# Altium PCB lab1_sokolov_usb_i2c.PcbDoc
Units mm, origin at the board's own origin, x right, y up, seen from the top; angles counter-clockwise.
Board outline 57.23 x 22.27 mm, 4 copper layers (Top Layer, Signal Layer 1, Signal Layer 2, Bottom Layer), stack 1.522 mm thick; 44 components, 33 nets, 163 pads, 97 vias.
Unrouted connection lines stored in the file: 1.
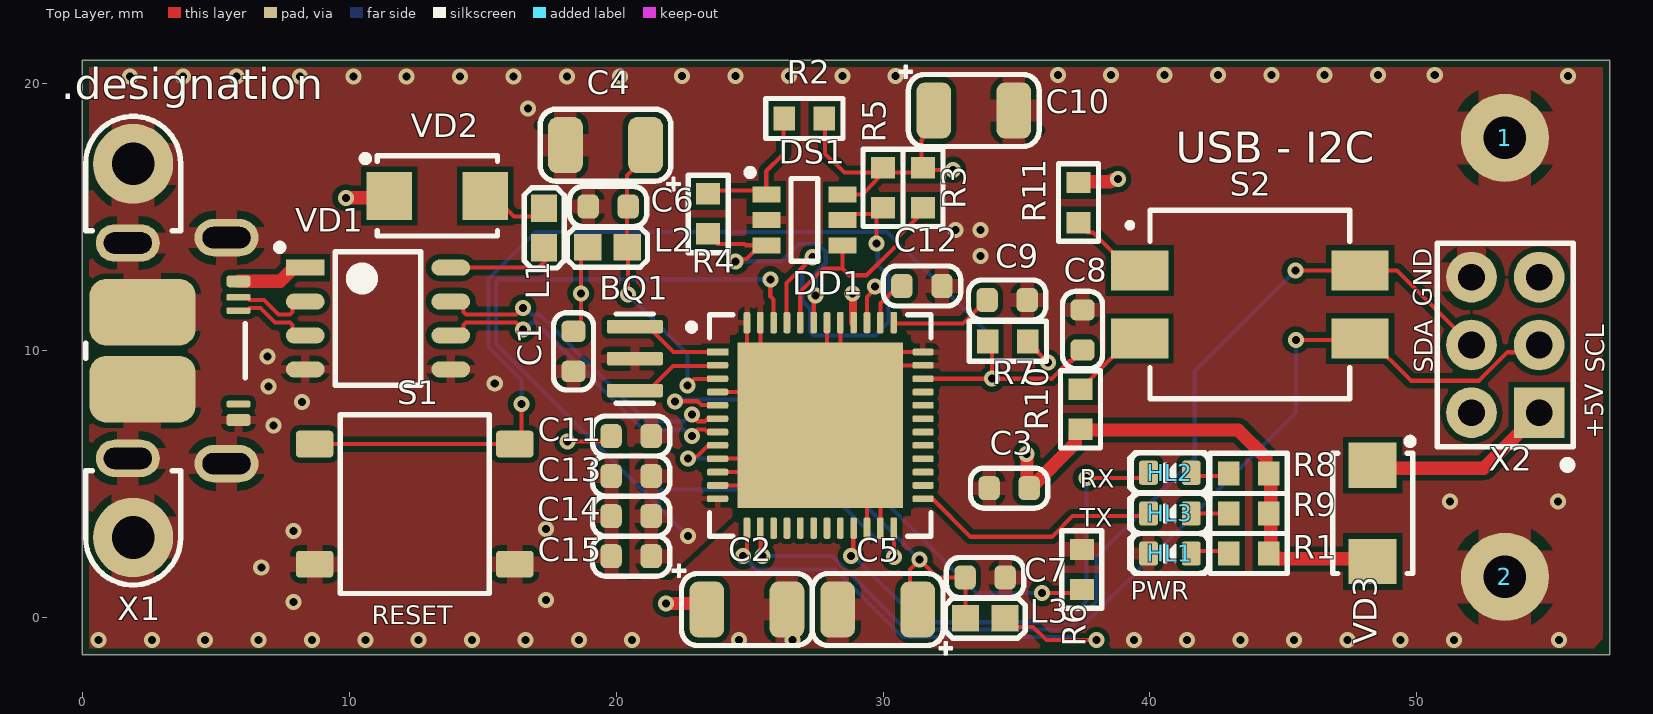
[diagram p0: Top Layer view]
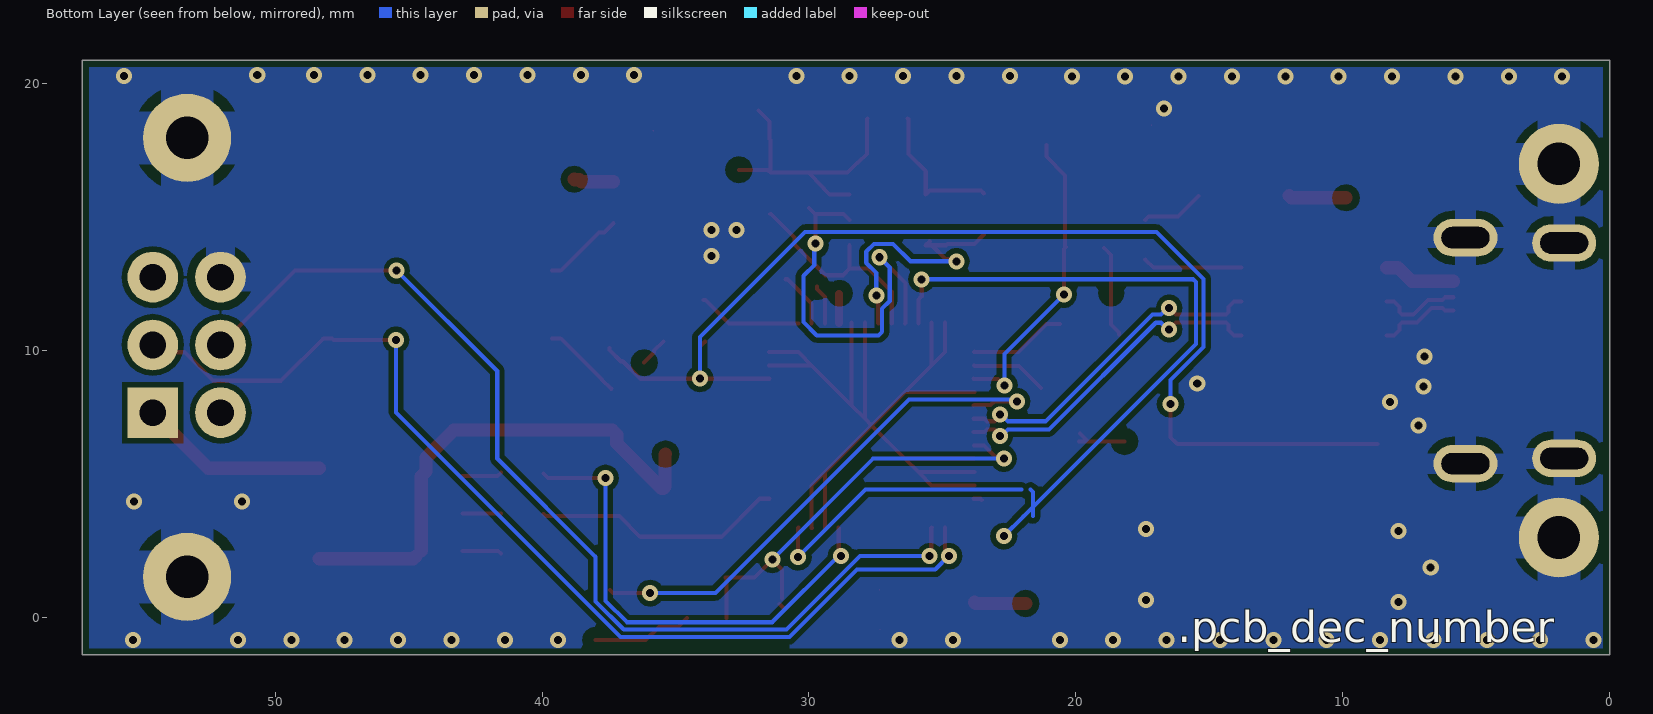
[diagram p1: Bottom Layer view, seen from below]
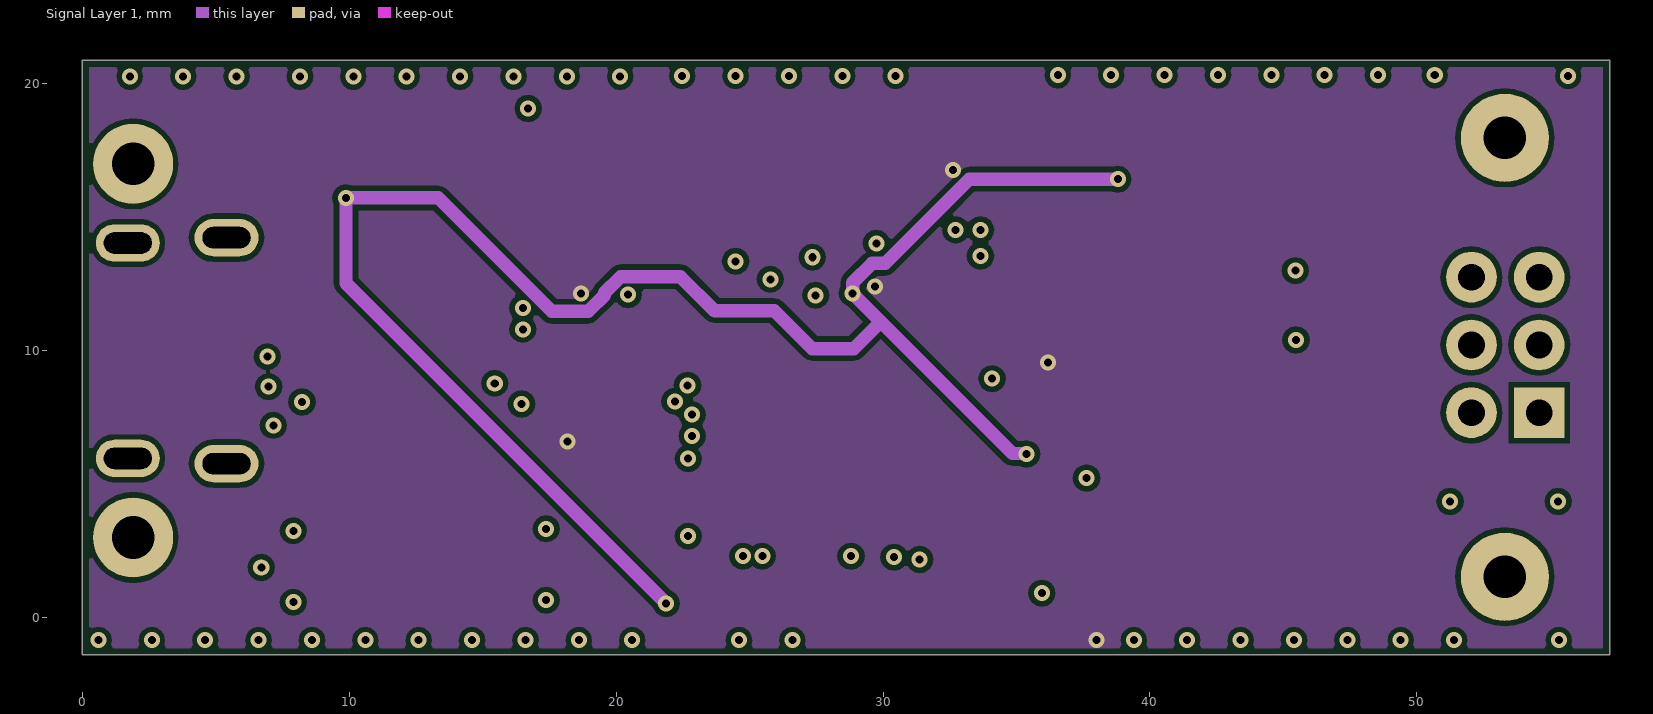
[diagram p2: Signal Layer 1]
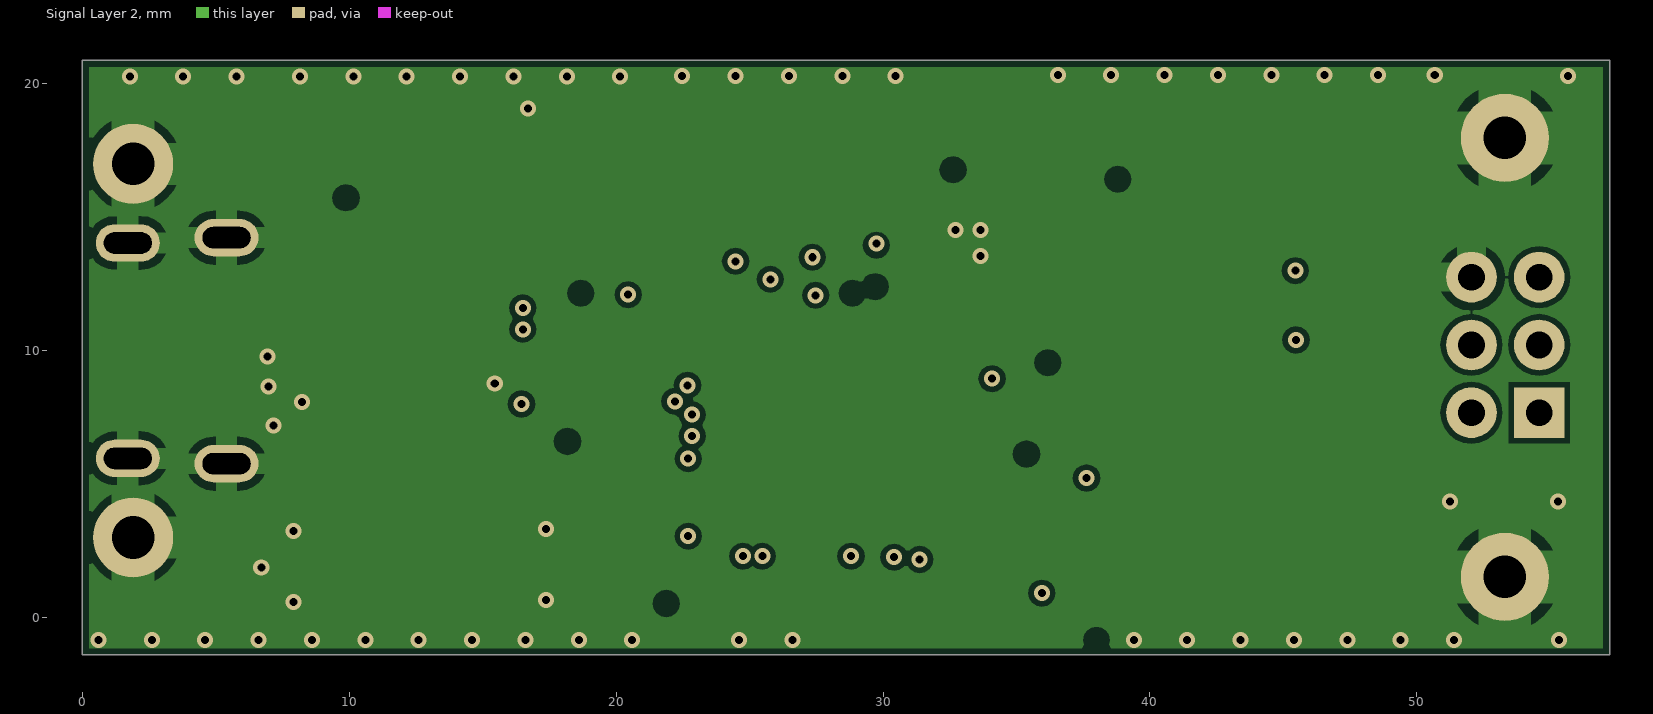
[diagram p3: Signal Layer 2]

## Layer stack, top to bottom
Top Solder: solder mask 0.0102, Solder Resist, Dk 3.5
Top Layer: signal copper 0.018
Prepreg 1: prepreg 0.125, FR4 HiTg170, Dk 5.07
Signal Layer 1: signal copper 0.018
Core 1: core 1.2, FR4, Dk 4.6
Signal Layer 2: signal copper 0.018
Prepreg 2: prepreg 0.125, FR4 HiTg170, Dk 5.07
Bottom Layer: signal copper 0.018
Bottom Solder: solder mask 0.0102, Solder Resist, Dk 3.5

## Board outline
0,-1.4 57.225,-1.4 57.225,20.875 0,20.875

## Design rules (kind name [scope] priority, off if disabled: settings)
AcuteAngle min_acute_angle [OnCopper] p1: minimum=3.50000000000000E+0001 checktracksonly=FALSE // Минимальный угол между примитивами топологии
BoardOutlineClearance board_outline_clearance_std [NOT (OnLayer('Bottom Overlay') OR OnLayer('Top Overlay'))] p1: gap=0.25 ignorepadtopadclearanceinfootprint=FALSE except(0: Arc-SplitContinuation Track-SplitContinuation SMDPad-SplitContinuation THPad-SplitContinuation Via-SplitContinuation Fill-SplitContinuation Poly-SplitContinuation Region-SplitContinuation Text-SplitContinuation) // Отступ элементов топологии от края фрезеруемой печатной платы
Clearance clearance_outer_18um_std [OnTopLayer OR OnBottomLayer] p1: gap=0.125 ignorepadtopadclearanceinfootprint=TRUE except(0.2: Arc-Fill Arc-Poly Track-Fill Track-Poly SMDPad-SMDPad SMDPad-Fill SMDPad-Poly THPad-Fill THPad-Poly Via-Fill Via-Poly Fill-Fill Fill-Poly Poly-Poly Poly-Region Poly-Text; 0.25: Arc-Hole Track-Hole SMDPad-Hole THPad-Hole Via-Hole Fill-Hole Poly-Hole Region-Hole Text-Hole) // Зазоры на внешних слоях
Clearance clearance_inner_18um_std [NOT (OnTopLayer Or OnBottomLayer)] p2: gap=0.125 ignorepadtopadclearanceinfootprint=FALSE except(0.2: Arc-Fill Arc-Poly Track-Fill Track-Poly SMDPad-SMDPad SMDPad-Fill SMDPad-Poly THPad-Fill THPad-Poly Via-Fill Via-Poly Fill-Fill Fill-Poly Poly-Poly Poly-Region Poly-Text; 0.25: Arc-Hole Track-Hole SMDPad-Hole THPad-Hole Via-Hole Fill-Hole Poly-Hole Region-Hole Text-Hole) // Зазоры на внутренних слоях
ComponentClearance [All] p1: gap=0 collisioncheckmode=3 verticalgap=0 showdistances=FALSE
DiffPairsRouting "Schematic Differential Pairs Routing_3" [InNet('D_N')] p1: maxlimit=0.254 minlimit=0.15 mostfreqgap=0.254 toplayer_maxgap=0.15 toplayer_prefgap=0.15 toplayer_minwidth=0.155 toplayer_maxwidth=0.155 toplayer_prefwidth=0.155 bottomlayer_maxgap=0.15 bottomlayer_prefgap=0.15 bottomlayer_minwidth=0.155 bottomlayer_maxwidth=0.155 bottomlayer_prefwidth=0.155 impedanceprofiledriven=TRUE impedanceprofileid={1B1F1868-2FFB-4D51-908A-913D90CA9AFC} impedanceprofilevalue=95.000000 maxuncoupledlength=12.7
DiffPairsRouting "Schematic Differential Pairs Routing_2" [InNet('D_P')] p2: maxlimit=0.254 minlimit=0.15 mostfreqgap=0.254 toplayer_maxgap=0.15 toplayer_prefgap=0.15 toplayer_minwidth=0.155 toplayer_maxwidth=0.155 toplayer_prefwidth=0.155 bottomlayer_maxgap=0.15 bottomlayer_prefgap=0.15 bottomlayer_minwidth=0.155 bottomlayer_maxwidth=0.155 bottomlayer_prefwidth=0.155 impedanceprofiledriven=TRUE impedanceprofileid={1B1F1868-2FFB-4D51-908A-913D90CA9AFC} impedanceprofilevalue=95.000000 maxuncoupledlength=12.7
DiffPairsRouting "Schematic Differential Pairs Routing_1" [InNet('USB_D_N')] p3: maxlimit=0.254 minlimit=0.15 mostfreqgap=0.254 toplayer_maxgap=0.15 toplayer_prefgap=0.15 toplayer_minwidth=0.155 toplayer_maxwidth=0.155 toplayer_prefwidth=0.155 bottomlayer_maxgap=0.15 bottomlayer_prefgap=0.15 bottomlayer_minwidth=0.155 bottomlayer_maxwidth=0.155 bottomlayer_prefwidth=0.155 impedanceprofiledriven=TRUE impedanceprofileid={1B1F1868-2FFB-4D51-908A-913D90CA9AFC} impedanceprofilevalue=95.000000 maxuncoupledlength=12.7
DiffPairsRouting "Schematic Differential Pairs Routing" [InNet('USB_D_P')] p4: maxlimit=0.254 minlimit=0.15 mostfreqgap=0.254 toplayer_maxgap=0.15 toplayer_prefgap=0.15 toplayer_minwidth=0.155 toplayer_maxwidth=0.155 toplayer_prefwidth=0.155 bottomlayer_maxgap=0.15 bottomlayer_prefgap=0.15 bottomlayer_minwidth=0.155 bottomlayer_maxwidth=0.155 bottomlayer_prefwidth=0.155 impedanceprofiledriven=TRUE impedanceprofileid={1B1F1868-2FFB-4D51-908A-913D90CA9AFC} impedanceprofilevalue=95.000000 maxuncoupledlength=12.7
DiffPairsRouting diff_pairs_routing [All] p5: maxlimit=0.254 minlimit=0.127 mostfreqgap=0.254 toplayer_maxgap=0.127 toplayer_prefgap=0.127 toplayer_minwidth=0.143 toplayer_maxwidth=0.143 toplayer_prefwidth=0.143 midlayer1_minwidth=0.381 midlayer1_maxwidth=0.381 midlayer1_prefwidth=0.381 midlayer2_minwidth=0.381 midlayer2_maxwidth=0.381 midlayer2_prefwidth=0.381 bottomlayer_maxgap=0.127 bottomlayer_prefgap=0.127 bottomlayer_minwidth=0.143 bottomlayer_maxwidth=0.143 bottomlayer_prefwidth=0.143 impedanceprofiledriven=TRUE maxuncoupledlength=12.7 // Правила трассировки дифференциальных пар
HoleSize min_hole_size_std [IsPad] p1: absolutevalues=TRUE maxlimit=5.9 minlimit=0.6 maxpercent=80.000 minpercent=20.000 // Диаметр межслойного переходного отверстия
HoleSize min_hole_size_via_std [IsVia] p2: absolutevalues=TRUE maxlimit=5.9 minlimit=0.3 maxpercent=80.000 minpercent=20.000 // Минимальный диаметр монтажного отверстия
HoleToHoleClearance hole_to_hole_clearance_std [All] p1: gap=0.2 allowstackedmicrovias=FALSE // Минимальное расстояние между краями двух отверстий
MinimumAnnularRing min_via_ar_std [All] p1: minimumring=0.15 // Поясок площадки переходного отверстия (Annular ring VIA)
MinimumAnnularRing min_pad_ar_std [All] p2: minimumring=0.2 // Поясок монтажной контактной площадки (Annular ring PAD)
MinimumSolderMaskSliver min_solder_mask_bridge_std [All] p1: minsoldermaskwidth=0.15 // Мнимальная ширина масочного мостика
PlaneClearance plane_clearance_18um_std [All] p1: clearance=0.2 // Отступ полигона (для слоя plane) от элементов топологии
PlaneConnect [All] p1: planeconnectstyle=Relief reliefexpansion=0.5 reliefentries=4 reliefconductorwidth=0.2 reliefairgap=0.2
PolygonConnect poly_connect_to_pad<=0.3 [(AsMM(PadXSize_AllLayers)<=0.301) or (AsMM(PadYSize_AllLayers)<=0.301)] p1: thpad.connectstyle=Relief thpad.reliefconductorwidth=0.2 thpad.reliefentries=4 thpad.polygonreliefangle="90 Angle" thpad.airgapwidth=0.2 smdpad.connectstyle=Relief smdpad.reliefconductorwidth=0.2 smdpad.reliefentries=4 smdpad.polygonreliefangle="90 Angle" smdpad.airgapwidth=0.2 via.connectstyle=Direct via.reliefconductorwidth=0.254 via.reliefentries=4 via.polygonreliefangle="90 Angle" via.airgapwidth=0.254 // Правила подключения полигонов для падов от 0,3мм и меньше
PolygonConnect poly_connect_to_pad<=0.4 [(AsMM(PadXSize_AllLayers)<=0.401) or (AsMM(PadYSize_AllLayers)<=0.401)] p2: thpad.connectstyle=Relief thpad.reliefconductorwidth=0.26 thpad.reliefentries=4 thpad.polygonreliefangle="90 Angle" thpad.airgapwidth=0.2 smdpad.connectstyle=Relief smdpad.reliefconductorwidth=0.26 smdpad.reliefentries=4 smdpad.polygonreliefangle="90 Angle" smdpad.airgapwidth=0.2 via.connectstyle=Direct via.reliefconductorwidth=0.254 via.reliefentries=4 via.polygonreliefangle="90 Angle" via.airgapwidth=0.254 // Правила подключения полигонов для падов от 0,4 и меньше
PolygonConnect poly_connect_to_pad<=0.6 [(AsMM(PadXSize_AllLayers)<=0.601) or (AsMM(PadYSize_AllLayers)<=0.601)] p3: thpad.connectstyle=Relief thpad.reliefconductorwidth=0.33 thpad.reliefentries=4 thpad.polygonreliefangle="90 Angle" thpad.airgapwidth=0.2 smdpad.connectstyle=Relief smdpad.reliefconductorwidth=0.33 smdpad.reliefentries=4 smdpad.polygonreliefangle="90 Angle" smdpad.airgapwidth=0.2 via.connectstyle=Direct via.reliefconductorwidth=0.254 via.reliefentries=4 via.polygonreliefangle="90 Angle" via.airgapwidth=0.254 // Правила подключения полигонов для падов от 0,6мм и меньше
PolygonConnect poly_connect_to_pad<=0.7 [(AsMM(PadXSize_AllLayers)<=0.701) or (AsMM(PadYSize_AllLayers)<=0.701)] p4: thpad.connectstyle=Relief thpad.reliefconductorwidth=0.46 thpad.reliefentries=4 thpad.polygonreliefangle="90 Angle" thpad.airgapwidth=0.2 smdpad.connectstyle=Relief smdpad.reliefconductorwidth=0.46 smdpad.reliefentries=4 smdpad.polygonreliefangle="90 Angle" smdpad.airgapwidth=0.2 via.connectstyle=Direct via.reliefconductorwidth=0.254 via.reliefentries=4 via.polygonreliefangle="90 Angle" via.airgapwidth=0.254 // Правила подключения полигонов для падов от 0,7мм и меньше
PolygonConnect poly_connect_to_pad<=0.8 [(AsMM(PadXSize_AllLayers)<=0.8)or(AsMM(PadYSize_AllLayers)<=0.8)] p5: thpad.connectstyle=Relief thpad.reliefconductorwidth=0.53 thpad.reliefentries=4 thpad.polygonreliefangle="90 Angle" thpad.airgapwidth=0.3 smdpad.connectstyle=Relief smdpad.reliefconductorwidth=0.53 smdpad.reliefentries=4 smdpad.polygonreliefangle="90 Angle" smdpad.airgapwidth=0.2 via.connectstyle=Direct via.reliefconductorwidth=0.254 via.reliefentries=4 via.polygonreliefangle="90 Angle" via.airgapwidth=0.254 // Правила подключения полигонов для падов от 0,8мм и меньше
PolygonConnect poly_connect_to_pad<=1 [(AsMM(PadXSize_AllLayers)<=1.01)or(AsMM(PadYSize_AllLayers)<=1.01)] p6: thpad.connectstyle=Relief thpad.reliefconductorwidth=0.6 thpad.reliefentries=4 thpad.polygonreliefangle="90 Angle" thpad.airgapwidth=0.3 smdpad.connectstyle=Relief smdpad.reliefconductorwidth=0.6 smdpad.reliefentries=4 smdpad.polygonreliefangle="90 Angle" smdpad.airgapwidth=0.2 via.connectstyle=Direct via.reliefconductorwidth=0.254 via.reliefentries=4 via.polygonreliefangle="90 Angle" via.airgapwidth=0.254 // Правила подключения полигонов для падов от 1мм и меньше
PolygonConnect poly_connect_to_pad<=1.3 [(AsMM(PadXSize_AllLayers)<=1.31)or(AsMM(PadYSize_AllLayers)<=1.31)] p7: thpad.connectstyle=Relief thpad.reliefconductorwidth=0.66 thpad.reliefentries=4 thpad.polygonreliefangle="90 Angle" thpad.airgapwidth=0.3 smdpad.connectstyle=Relief smdpad.reliefconductorwidth=0.86 smdpad.reliefentries=4 smdpad.polygonreliefangle="90 Angle" smdpad.airgapwidth=0.2 via.connectstyle=Direct via.reliefconductorwidth=0.254 via.reliefentries=4 via.polygonreliefangle="90 Angle" via.airgapwidth=0.254 // Правила подключения полигонов для падов от 1,3мм и меньше
PolygonConnect poly_connect_to_pad<=1.6 [(AsMM(PadXSize_AllLayers)<=1.61)or(AsMM(PadYSize_AllLayers)<=1.61)] p8: thpad.connectstyle=Relief thpad.reliefconductorwidth=0.8 thpad.reliefentries=4 thpad.polygonreliefangle="90 Angle" thpad.airgapwidth=0.3 smdpad.connectstyle=Relief smdpad.reliefconductorwidth=1 smdpad.reliefentries=4 smdpad.polygonreliefangle="90 Angle" smdpad.airgapwidth=0.2 via.connectstyle=Direct via.reliefconductorwidth=0.254 via.reliefentries=4 via.polygonreliefangle="90 Angle" via.airgapwidth=0.254 // Правила подключения полигонов для падов от 1,6мм и меньше
PolygonConnect poly_connect_to_pad<=1.8 [(AsMM(PadXSize_AllLayers)<=1.8)or(AsMM(PadYSize_AllLayers)<=1.8)] p9: thpad.connectstyle=Relief thpad.reliefconductorwidth=1 thpad.reliefentries=4 thpad.polygonreliefangle="90 Angle" thpad.airgapwidth=0.3 smdpad.connectstyle=Relief smdpad.reliefconductorwidth=1.2 smdpad.reliefentries=4 smdpad.polygonreliefangle="90 Angle" smdpad.airgapwidth=0.2 via.connectstyle=Direct via.reliefconductorwidth=0.254 via.reliefentries=4 via.polygonreliefangle="90 Angle" via.airgapwidth=0.254 // Правила подключения полигонов для падов от 1,8мм и меньше
PolygonConnect poly_connect_to_pad<=2 [(AsMM(PadXSize_AllLayers)<=2.01)or(AsMM(PadYSize_AllLayers)<=2.01)] p10: thpad.connectstyle=Relief thpad.reliefconductorwidth=1.1 thpad.reliefentries=4 thpad.polygonreliefangle="90 Angle" thpad.airgapwidth=0.3 smdpad.connectstyle=Relief smdpad.reliefconductorwidth=1.4 smdpad.reliefentries=4 smdpad.polygonreliefangle="90 Angle" smdpad.airgapwidth=0.2 via.connectstyle=Direct via.reliefconductorwidth=0.254 via.reliefentries=4 via.polygonreliefangle="90 Angle" via.airgapwidth=0.254 // Правила подключения полигонов для падов от 2мм и меньше
PolygonConnect poly_connect_to_pad<=2.3 [(AsMM(PadXSize_AllLayers)<=2.31)or(AsMM(PadYSize_AllLayers)<=2.31)] p11: thpad.connectstyle=Relief thpad.reliefconductorwidth=1.2 thpad.reliefentries=4 thpad.polygonreliefangle="90 Angle" thpad.airgapwidth=0.3 smdpad.connectstyle=Relief smdpad.reliefconductorwidth=1.4 smdpad.reliefentries=4 smdpad.polygonreliefangle="90 Angle" smdpad.airgapwidth=0.2 via.connectstyle=Direct via.reliefconductorwidth=0.254 via.reliefentries=4 via.polygonreliefangle="90 Angle" via.airgapwidth=0.254 // Правила подключения полигонов для падов от 2,3мм и меньше
PolygonConnect poly_connect_to_pad<=2.5 [(AsMM(PadXSize_AllLayers)<=2.51)or(AsMM(PadYSize_AllLayers)<=2.51)] p12: thpad.connectstyle=Relief thpad.reliefconductorwidth=1.2 thpad.reliefentries=4 thpad.polygonreliefangle="90 Angle" thpad.airgapwidth=0.3 smdpad.connectstyle=Relief smdpad.reliefconductorwidth=1.4 smdpad.reliefentries=4 smdpad.polygonreliefangle="90 Angle" smdpad.airgapwidth=0.2 via.connectstyle=Direct via.reliefconductorwidth=0.254 via.reliefentries=4 via.polygonreliefangle="90 Angle" via.airgapwidth=0.254 // Правила подключения полигонов для падов от 2,5мм и меньше
PolygonConnect poly_connect_to_pad<=2.7 [(AsMM(PadXSize_AllLayers)<=2.71)or(AsMM(PadYSize_AllLayers)<=2.71)] p13: thpad.connectstyle=Relief thpad.reliefconductorwidth=1.4 thpad.reliefentries=4 thpad.polygonreliefangle="90 Angle" thpad.airgapwidth=0.3 smdpad.connectstyle=Relief smdpad.reliefconductorwidth=1.6 smdpad.reliefentries=4 smdpad.polygonreliefangle="90 Angle" smdpad.airgapwidth=0.2 via.connectstyle=Direct via.reliefconductorwidth=0.254 via.reliefentries=4 via.polygonreliefangle="90 Angle" via.airgapwidth=0.254 // Правила подключения полигонов для падов от 2,7мм и меньше
PolygonConnect poly_connect_to_pad<=3 [(AsMM(PadXSize_AllLayers)<=3.01)or(AsMM(PadYSize_AllLayers)<=3.01)] p14: thpad.connectstyle=Relief thpad.reliefconductorwidth=1.6 thpad.reliefentries=4 thpad.polygonreliefangle="90 Angle" thpad.airgapwidth=0.3 smdpad.connectstyle=Relief smdpad.reliefconductorwidth=1.8 smdpad.reliefentries=4 smdpad.polygonreliefangle="90 Angle" smdpad.airgapwidth=0.2 via.connectstyle=Direct via.reliefconductorwidth=0.254 via.reliefentries=4 via.polygonreliefangle="90 Angle" via.airgapwidth=0.254 // Правила подключения полигонов для падов от 3мм и меньше
PolygonConnect poly_connect_to_pad<=7 [(AsMM(PadXSize_AllLayers)<7.01)or(AsMM(PadYSize_AllLayers)<=7.01)] p15: thpad.connectstyle=Relief thpad.reliefconductorwidth=2 thpad.reliefentries=4 thpad.polygonreliefangle="90 Angle" thpad.airgapwidth=0.4 smdpad.connectstyle=Relief smdpad.reliefconductorwidth=2 smdpad.reliefentries=4 smdpad.polygonreliefangle="90 Angle" smdpad.airgapwidth=0.3 via.connectstyle=Direct via.reliefconductorwidth=0.254 via.reliefentries=4 via.polygonreliefangle="90 Angle" via.airgapwidth=0.254 // Правила подключения полигонов для падов от 7мм и меньше
PolygonConnect poly_connect_to_pad [All] p16: thpad.connectstyle=Relief thpad.reliefconductorwidth=0.25 thpad.reliefentries=4 thpad.polygonreliefangle="90 Angle" thpad.airgapwidth=0.2 smdpad.connectstyle=Relief smdpad.reliefconductorwidth=0.25 smdpad.reliefentries=4 smdpad.polygonreliefangle="90 Angle" smdpad.airgapwidth=0.2 via.connectstyle=Direct via.reliefconductorwidth=0.25 via.reliefentries=4 via.polygonreliefangle="90 Angle" via.airgapwidth=0.2 // Правила подключения полигонов общие
RoutingCorners [All] p1 off: cornerstyle=45-Degree minsetback=2.5 maxsetback=2.5
RoutingVias [All] p1: holewidth=0.3 width=0.6 viastyle="Through Hole" minholewidth=0.3 minwidth=0.6 maxholewidth=5.9 maxwidth=6.4
SilkToSilkClearance silk_to_silk_clearance_std [All] p1 off: silktosilkclearance=0.15 // Отступ текста шелкографии от других примитивов шелкографии
SilkToSolderMaskClearance silk_to_solder_mask_clearance_std [IsPad] p1 off: minsilkscreentomaskgap=0.15 clearancetoexposedcopper=FALSE // Минимальное расстояние между элементами шелкографии и вскрытой медью
SolderMaskExpansion solder_mask_expansion_std [All] p1: expansion=0.05 // Припуск паяльной масски
UnRoutedNet [All] p1: checkbadconnections=TRUE
Width width_18um_std [All] p1: maxlimit=10 minlimit=0.125 preferedwidth=0.15 checkconnectedcopper=TRUE // Ширина проводников (общая)
19 further rules are at their usual default settings.

## Classes and differential pairs
differential pair class USB_NETS_CLASS: D USB_D
differential pair USB_D: +USB_D_P -USB_D_N
differential pair D: +D_P -D_N

## Components (designator, comment, footprint, x,y, rotation, side; value= is the part's Value field where it differs from the comment)
1 "MOUNTING_HOLE" HOLE_1,6X3,3 53.3,17.975 r90 top
2 "MOUNTING_HOLE" HOLE_1,6X3,3 53.3,1.525 r90 top
BQ1 "CSTCE12M0G52A-R0" CSTCE-3-320X130X70 20.7,9.7 r90 top
C1 "0,1 мк" C0603 18.4,9.975 r270 top
C2 "4,7 мк" C3216-18 24.9,0.3 r0 top
C3 "0,1 мк" C0603 34.725,4.85 r180 top
C4 "4,7 мк" C3216-18 19.6,17.7 r180 top
C5 "4,7 мк" C3216-18 29.8,0.3 r180 top
C6 "0,1 мк" C0603 19.7,15.4 r180 top
C7 "0,1 мк" C0603 33.825,1.5 r0 top
C8 "0,1 мк" C0603 37.475,10.775 r90 top
C9 "0,1 мк" C0603 34.65,11.9 r180 top
C10 "4,7 мк" C3216-18 33.4,19 r0 top
C11 "0,1 мк" C0603 20.56,6.8 r0 top
C12 "0,1 мк" C0603 31.458,12.425 r0 top
C13 "0,1 мк" C0603 20.56,5.3 r180 top
C14 "0,1 мк" C0603 20.56,3.8 r180 top
C15 "0,1 мк" C0603 20.56,2.3 r180 top
DD1 "FT232HQ" QFN-48-800X800X90 27.65,7.2 r0 top
DS1 "93LC56BT-I/OT" SOT-23-6 27.05,14.9 r0 top
HL1 "TLMG1100-GS08" HL0603 40.75,2.4 r0 top
HL2 "TLMB1100-GS08" HL0603 40.75,5.425 r0 top
HL3 "TLMB1100-GS08" HL0603 40.75,3.9 r0 top
L1 "BLM18KG221SH1D" BLM-2-0603 17.3,14.6 r270 top
L2 "BLM18KG221SH1D" BLM-2-0603 19.675,13.875 r0 top
L3 "BLM18KG221SH1D" BLM-2-0603 33.835,-0.025 r180 top
R1 "220" R0603 43.7,2.4 r180 top
R2 "10 к" R0603 27.05,18.7 r180 top
R3 "10 к" R0603 31.5,16.1 r270 top
R4 "2 к" R0603 23.45,15.125 r270 top
R5 "10 к" R0603 30,16.1 r270 top
R6 "12 к" R0603 37.45,1.8 r270 top
R7 "10 к" R0603 34.675,10.35 r180 top
R8 "10 к" R0603 43.7,5.4 r0 top
R9 "10 к" R0603 43.7,3.9 r0 top
R10 "10 к" R0603 37.4,7.8 r270 top
R11 "10 к" R0603 37.325,15.55 r90 top
S1 "KLS7-TS6604-5.0-180-B" KLS7-TS6604-5.0-180-B 12.45,4.25 r180 top
S2 "SDA02H1SBD" SDA02H1SBD 43.75,11.73 r0 top
VD1 "USB6B1" SO-8 11.075,11.205 r0 top
VD2 "SL13-E3/5AT" DO-214AC 13.3,15.8 r0 top
VD3 "SL13-E3/5AT" DO-214AC 48.35,3.9 r270 top
X1 "2108877-1" 2108877-1 2.15,10 r90 top
X2 "DS1021-2*3SF11" DS1021-2X3SF11 53.32,10.215 r90 top

## Footprints (in the part's own frame and the unit in brackets; to place one, negate y for a bottom-side part, rotate by r counter-clockwise, add the part's x,y. Pads: shape width x height; smd on the part's side, far side on the other; paste and mask are expansions set on the pad)
2108877-1 [mm]
  rrect50% 0.45x0.9 smd: 1(2.6,-3.696) 5(-2.6,-3.696)
  rrect50% 0.25x0.9 smd: 2(2,-3.696) 3(1.5,-3.696) 4(-2,-3.696)
  round 3 hole 1.6: TP1(-7,0.25) TP1(7,0.25)
  oval 1.4x2.4 hole 0.8 slot 1.8 at 90 deg mask+0.102: TP1(-4.235,-3.25) TP1(-4.035,0.45) TP1(4.035,0.45) TP1(4.235,-3.25)
  rrect50% 2.5x3.98 smd: TP1(-1.441,-0.104) TP1(1.441,-0.104)
  silkscreen extent -8.78,-3.95 8.78,2.03, body extent -8.9,-3.95 8.9,3.95, height 3.39
BLM-2-0603 [mm] "Chip Inductor, 2-Leads, Body 1,60x0,80mm, IPC Medium Density"
  rect 1.02x0.98 smd: 1(-0.74,0) 2(0.74,0)
  silkscreen extent -1.5,-0.75 1.5,0.75, body extent -0.8,-0.37 0.8,0.38, height 0.8
C0603 [mm] "Chip Capacitor, 2-Leads, Body 1,60x0,80mm, IPC Medium Density"
  rrect50% 0.8x0.9 smd: 1(-0.75,0) 2(0.75,0)
  silkscreen extent -1.45,-0.75 1.45,0.75, body extent -0.8,-0.4 0.8,0.4, height 0.8
C3216-18 [mm] "Chip Tantalum Capacitor, 2-Leads, Body 3,20x1,60mm, IPC Medium Density"
  rrect50% 1.3x2.1 smd: 1(-1.5,0) 2(1.5,0)
  Top Layer lines w0.05: 2.425,-0.75 2.45,-0.75
  silkscreen extent -2.8,-1.35 2.45,1.7, body extent -1.7,-0.95 1.7,0.95, height 1.83
CSTCE-3-320X130X70 [mm]
  rrect25% 0.5x2.1 smd paste-0.025 mask+0.1: 1(-1.2,0) 2(0,0) 3(1.2,0)
  silkscreen extent -1.68,-0.7 1.67,0.7, body extent -1.6,-0.65 1.6,0.65, height 0.8
DO-214AC [mm] "Molded Diode, 2-Leads, Body 4,25x2,67mm, IPC Medium Density"
  rect 1.7x1.8 smd: 1(-1.8,0) 2(1.8,0)
  silkscreen extent -2.82,-1.5 2.25,1.52, body extent -2.55,-1.3 2.55,1.3, height 2.26
DS1021-2X3SF11 [mm]
  rect 1.9x1.9 hole 1: 1(-2.54,-1.27)
  round 1.9 hole 1: 2(-2.54,1.27) 3(0,-1.27)
  round 1.9 hole 1 mask+0.102: 4(0,1.27) 5(2.54,-1.27) 6(2.54,1.27)
  silkscreen extent -4.5,-2.55 3.81,2.54, body extent -3.81,-2.54 3.81,2.54, height 8.59
HL0603 [mm] "Chip Resistor, 2-Leads, Body 1,60x0,80mm, IPC Medium Density"
  rrect25% 0.7x0.9 smd: 1(-0.8,0) 2(0.8,0)
  silkscreen extent -1.5,-0.75 1.5,0.75, body extent -0.81,-0.4 0.81,0.4, height 0.64
HOLE_1,6X3,3 [mm]
  round 3.3 hole 1.6: 1(0,0)
KLS7-TS6604-5.0-180-B [mm]
  rrect25% 1.4x1 smd: 1(-3.75,2.25) 1(3.75,2.25) 2(-3.75,-2.25) 2(3.75,-2.25)
  silkscreen extent -2.79,-3.35 2.79,3.35, body extent -4,-3.25 4,3.25, height 4.3
QFN-48-800X800X90 [mm] "QFN, 48-Leads, Body 8,00x8,00mm, Pitch 0,50mm, Thermal Pad 6,20x6,20mm, IPC Medium Density"
  rect 6.2x6.2 smd: 0(0,0)
  rect 0.8x0.25 smd: 1(-3.85,2.75)
  rrect50% 0.8x0.25 smd: 2(-3.85,2.25) 3(-3.85,1.75) 4(-3.85,1.25) 5(-3.85,0.75) 6(-3.85,0.25) 7(-3.85,-0.25) 8(-3.85,-0.75) 9(-3.85,-1.25) 10(-3.85,-1.75) 11(-3.85,-2.25) 12(-3.85,-2.75) 25(3.85,-2.75) 26(3.85,-2.25) 27(3.85,-1.75) 28(3.85,-1.25) 29(3.85,-0.75) 30(3.85,-0.25) 31(3.85,0.25) 32(3.85,0.75) 33(3.85,1.25) 34(3.85,1.75) 35(3.85,2.25) 36(3.85,2.75)
  rrect50% 0.25x0.8 smd: 13(-2.75,-3.85) 14(-2.25,-3.85) 15(-1.75,-3.85) 16(-1.25,-3.85) 17(-0.75,-3.85) 18(-0.25,-3.85) 19(0.25,-3.85) 20(0.75,-3.85) 21(1.25,-3.85) 22(1.75,-3.85) 23(2.25,-3.85) 24(2.75,-3.85) 37(2.75,3.85) 38(2.25,3.85) 39(1.75,3.85) 40(1.25,3.85) 41(0.75,3.85) 42(0.25,3.85) 43(-0.25,3.85) 44(-0.75,3.85) 45(-1.25,3.85) 46(-1.75,3.85) 47(-2.25,3.85) 48(-2.75,3.85)
  silkscreen extent -4.95,-4.15 4.15,4.15, body extent -4,-4 4,4, height 0.85
R0603 [mm] "Chip Resistor, 2-Leads, Body 1,60x0,80mm, IPC Medium Density"
  rect 0.8x0.9 smd: 1(-0.75,0) 2(0.75,0)
  silkscreen extent -1.45,-0.75 1.45,0.75, body extent -0.77,-0.43 0.78,0.43, height 0.43
SDA02H1SBD [mm]
  rect 2.15x1.5 smd: 1(-4.125,-1.27) 2(4.125,-1.27) 3(-4.125,1.27) 4(4.125,1.27)
  silkscreen extent -4.6,-3.53 3.74,3.53, body extent -4.65,-3.53 4.65,3.53, height 5.44
SO-8 [mm] "SOIC, 8-Leads, Body 4,90x3,90mm, Pitch 1,27mm, IPC Medium Density"
  rect 1.45x0.6 smd: 1(-2.725,1.905)
  oval 1.45x0.6 smd: 2(-2.725,0.635) 3(-2.725,-0.635) 4(-2.725,-1.905) 5(2.725,-1.905) 6(2.725,-0.635) 7(2.725,0.635) 8(2.725,1.905)
  silkscreen extent -3.81,-2.5 1.6,2.79, body extent -3.06,-2.47 3.06,2.48, height 1.75
SOT-23-6 [mm] "SOT-23, 6-Leads, Body 2,90x2,70mm, Pitch 0,95mm, IPC Medium Density"
  rect 1.05x0.6 smd: 1(-1.425,0.95) 2(-1.425,0) 3(-1.425,-0.95) 4(1.425,-0.95) 5(1.425,0) 6(1.425,0.95)
  silkscreen extent -2.16,-1.55 0.5,1.9, body extent -1.41,-1.45 1.41,1.45, height 1.45

## Part data
BQ1: library part bq0001, "=Описание", HelpURL=https://www.murata.com/en-us/products/productdetail?partno=CSTCE12M0G52A-R0, id=bq0001, Корпус="3,20 x 1,30 x 0,70", Наименование=CSTCE12M0G52A-R0, Описание="Кварцевый резонатор 12 МГц", Производитель="Murata Manufacturing Co., Ltd.", Фамилия=Самарин, Частота="12 МГц"
C1 C3 C6 C7 C8 C9 C11 C12 C13 C14 C15: library part c0054, "=Описание", HelpURL=https://www.yageo.com/upload/media/product/productsearch/datasheet/mlcc/UPY-GPHC_X7R_6.3V-to-50V_20.pdf, id=c0054, Корпус=0603, Наименование=CC0603KRX7R6BB104, Напряжение="10 В", Номинал="0,1 мк", Номинальное напряжение="10 В", Описание="Конденсатор керамический чип 0603 100 нФ 10 В ±10 %", Отклонение="±10 %", Производитель="YAGEO Corp.", Рабочие температуры="от –55 °С до +125 °С", Температурный коэффициент емкости=X7R, Фамилия=Паньков
C2 C4 C5 C10: library part c0044, "=Описание", HelpURL=https://www.vishay.com/capacitors/list/product-40002/, id=c0044, Корпус=3216-18, Наименование=293D475X9010A2TE3, Напряжение="10 В", Номинал="4,7 мк", Номинальное напряжение="10 В", Описание="Конденсатор танталовый чип 3216-18 4,7 мкФ 10 В ±10 %", Отклонение="±10 %", Производитель="Vishay Intertechnology, Inc.", Рабочие температуры="от –55 °С до +125 °С", Среднеквадратичный размах пульсации тока="0,12 А", Фамилия=Паньков, Эквивалентное последовательное сопротивление="5,0 Ом"
DD1: library part dd0019, "=Описание", HelpURL=https://ftdichip.com/products/ft232hq/, id=dd0019, Корпус=QFN-48, Наименование=FT232HQ, Описание="Преобразователь USB-I2C", Производитель="FTDI Limited", Фамилия=Соколов
DS1: library part ds0001, "=Описание", HelpURL=https://www.microchip.com/wwwproducts/en/93LC56B, id=ds0001, Корпус=SOT-23-6, Наименование=93LC56BT-I/OT, Описание="EEPROM 2 Кб 3 линии", Производитель="Microchip Technology Inc.", Фамилия=Соколов
HL1: library part hl0005, "=Описание", Colour=Зеленый, HelpURL=https://www.vishay.com/leds/list/product-83173/, id=hl0005, Корпус=0603, Наименование=TLMG1100-GS08, Номинальная длина волны="570 нм", Номинальная сила света="35 мкд", Номинальное падение напряжения="2,1 В", Номинальный прямой ток="30 мА", Описание="Светодиод чип 0603 зеленый", Производитель="Vishay Intertechnology, Inc.", Рабочие температуры="от –40 °С до +100 °С", Рассеиваемая мощность="90 мВт", Фамилия=Ларионов, Цвет=Зеленый
HL2 HL3: library part hl0006, "=Описание", Colour=Синий, HelpURL=https://www.vishay.com/leds/list/product-83173/, id=hl0006, Корпус=0603, Наименование=TLMB1100-GS08, Номинальная длина волны="466 нм", Номинальная сила света="5 мкд", Номинальное падение напряжения="3,9 В", Номинальный прямой ток="30 мА", Описание="Светодиод чип 0603 синий", Примечание="Not for new design", Производитель="Vishay Intertechnology, Inc.", Рабочие температуры="от –40 °С до +100 °С", Рассеиваемая мощность="90 мВт", Фамилия=Ларионов, Цвет=Синий
L1 L2 L3: library part l0001, "=Описание", HelpURL=https://www.murata.com/en-global/products/productdetail?partno=BLM18KG221SH1%23, id=l0001, Корпус=0603, Наименование=BLM18KG221SH1D, Описание="Ферритовая бусина 220 Ом ±25 %", Отклонение, 100 МГц="±25 %", Производитель="Murata Manufacturing Co., Ltd.", Рабочие температуры="от –55 °С до +125 °С", Сопротивление, 100 МГц="220 Ом", Сопротивление при постоянном токе="0,05 Ом", Фамилия=Ларионов
R1: library part r0008, "=Описание", HelpURL=https://www.yageo.com/upload/media/product/productsearch/datasheet/rchip/PYu-RC_Group_51_RoHS_L_11.pdf, id=r0008, Корпус=0603, Наименование=RC0603FR-07220RL, Номинал=220, Номинальное напряжение="75 В", Номинальный ток="1 А", Описание="Резистор чип 0603 220 Ом ±1 % 0,1 Вт", Отклонение="±1 %", Производитель=Yageo, Рабочие температуры="от -55 °С до +155 °С", Фамилия=Ларионов
R2 R3 R5: library part r0011, "=Описание", HelpURL=https://www.yageo.com/upload/media/product/productsearch/datasheet/rchip/PYu-RC_Group_51_RoHS_L_11.pdf, id=r0011, Корпус=0603, Наименование=RC0603FR-0710KL, Номинал="10 к", Номинальное напряжение="75 В", Номинальный ток="1 А", Описание="Резистор чип 0603 10 кОм ±1 % 0,1 Вт", Отклонение="±1 %", Производитель=Yageo, Рабочие температуры="от -55 °С до +155 °С", Фамилия=Самарин
R4: library part r0013, "=Описание", HelpURL=https://ru.mouser.com/datasheet/2/219/RS73-1759534.pdf, id=r0013, Корпус=0603, Наименование=RS73G1JTTD2001F, Номинал="2 к", Номинальное напряжение="100 В", Номинальный ток="1 А", Описание="Резистор чип 0603 2 кОм ±1 % 0,1 Вт", Отклонение="±1 %", Производитель="KOA Speer", Рабочие температуры="от -55 °С до +155 °С", Фамилия=Соколов
R6: library part r0064, "=Описание", HelpURL=https://www.yageo.com/upload/media/product/productsearch/datasheet/rchip/PYu-AC_51_RoHS_L_7.pdf, id=r0064, Корпус=0603, Наименование=AC0603FR-1012KL, Номинал="12 к", Номинальное напряжение="75 В", Номинальный ток="1 А", Описание="Резистор чип 0603 12 кОм ±1 % 0,1 Вт", Отклонение="±1 %", Примечание="Ряд E24", Производитель="YAGEO Corp.", Рабочие температуры="от –55 °С до +155 °С", Фамилия=Соколов
R7 R8 R9 R10 R11: library part r0012, "=Описание", HelpURL=https://www.yageo.com/upload/media/product/productsearch/datasheet/rchip/PYu-RC_Group_51_RoHS_L_11.pdf, id=r0012, Корпус=0603, Наименование=RC0603FR-0710KL, Номинал="10 к", Номинальное напряжение="75 В", Номинальный ток="1 А", Описание="Резистор чип 0603 10 кОм ±1 % 0,1 Вт", Отклонение="±1 %", Производитель=Yageo, Рабочие температуры="от -55 °С до +155 °С", Фамилия=Самарин
S1: library part s0002, "=Описание", HelpURL=http://www.klsele.com/products/Switches/Tact-Switches-Series/939.html, id=s0002, Количество контактов=4, Корпус="6,00 x 6,00 x 5,00", Наименование=KLS7-TS6604-5.0-180-B, Описание="Тактовая кнопка поверхностного монтажа", Производитель="Ningbo KLS Electronic Co., Ltd.", Промывка=Запрещена, Рабочие температуры="от –20 °С до +70 °С", Сопротивление контакта="50 мОм", Ток нагрузки="50 мА @ 12 В", Фамилия=Паньков
S2: library part s0006, "=Описание", HelpURL=https://www.ckswitches.com/products/switches/product-details/DIP/SDA/SDA02H1SBD/, id=s0006, Количество контактов=4, Корпус="7,06 х 9,30 х 5,45", Наименование=SDA02H1SBD, Описание="2-х позиционный движковый переключатель", Производитель=C&K, Промывка=Запрещена, Рабочие температуры="от –40 °С до +85 °С", Сопротивление контакта="50 мОм", Ток нагрузки="100 мА @ 5 В", Фамилия=Козлов
VD1: library part vd0005, "=Описание", HelpURL=https://www.st.com/content/st_com/en/products/protection-devices/esd-protection/usb-port-protection/usb6b1.html, id=vd0005, Корпус=SO-8, Наименование=USB6B1, Описание="Диодная сборка для подавления помех, от 6 В", Производитель=STMicroelectronics, Фамилия=Ларионов
VD2 VD3: library part vd0003, "=Описание", HelpURL=https://www.vishay.com/product?docid=88740, id=vd0003, Корпус=DO-214AC, Максимальное обратное напряжение="30 В", Максимальное прямое напряжение="0,445 В", Максимальный прямой ток="1,5 А", Наименование=SL13-E3/5AT, Описание="Диод Шоттки 30 В 1,5 А", Производитель="Vishay Intertechnology, Inc.", Рабочие температуры="от –55 °С до +125 °С", Фамилия=Ларионов
X1: library part 2108877-1_micro_usb-b, Contact_1=VBUS, Contact_2=D-, Contact_3=D+, Contact_4=ID, Contact_5=GND, Наименование=2108877-1
X2: library part x0003, "=Описание", Contact_1=+5V, Contact_2=NC, Contact_3=SCL, Contact_4=SDA, Contact_5=NC, Contact_6=GND, HelpURL=http://www.connfly.com/productshow.aspx?id=118, id=x0003, Наименование=DS1021-2*3SF11, Описание="PLS 3x2 pin 2,54 мм вилка прямой", Производитель="Connfly Electronic Co. LTD", Фамилия=Самарин
1 2: id=fstn0011, Диаметр отверстия="1,6 мм", Наименование="Отверстие 1,6x3,3", Описание="Отверстие под М1,5", Параметры металлизации="3,3 мм"

## Via types
v1: diameter 0.6, hole 0.3, Top Layer to Bottom Layer, tented both sides, 86 vias
v2: diameter 0.6, hole 0.3, Top Layer to Signal Layer 1, tented both sides, 11 vias

## Nets (pads, with @x,y where several pads share a name; then routed paths per layer and width w, separated by ;. In a path a pad name is that pad's centre, name@x,y a point inside that pad or via, vN(x,y) a via of type N, cw(c..) or ccw(c..) an arc to the next point about the centre after c; other vN are vias at no path point)
+1.8V: C12.1 DD1.38 | length 2.1
  Top Layer w0.155: DD1.38@29.9,11.025 29.9,11.775 30.8,12.675 C12.1@30.875,12.675
+3.3V: C1.1 C10.1 C11.1 DD1.39 DS1.6 L2.1 L3.1 R2.1 R3.1 R5.1 R7.1 | length 22.9
  Top Layer w0.15: v2(18.175,6.6) C11.1@19.875,6.6 ; C1.1@18.375,10.6 18.375,10.675 18.675,10.975 v2(18.675,12.15) 18.675,13.59 L2.1@18.935,13.85 ; C11.1@19.535,6.6 C11.1@19.835,6.9 ; R2.1 27.825,18.675 27.825,17.375 28.175,17.025 28.2,17.025 28.55,16.675 R5.1@30.025,16.675 ; DS1.6 29.225,15.85 29.45,16.075 29.45,16.1 R5.1@30.025,16.675 ; C10.1 31.479,18.579 31.479,17.929 31.45,17.9 R3.1@31.45,16.675 ; v2(32.625,16.775) 31.55,16.775 R3.1@31.45,16.675 ; L3.1 34.904,-0.354 35.629,-0.354 36.125,-0.85 v2(38,-0.85) ; R7.1@35.45,10.35 35.8,10 35.8,9.925 v2(36.175,9.55) ; R5.1@30.025,16.675 R3.1@31.45,16.675
  Top Layer w0.155: DD1.39@29.4,11.025 29.4,12.011 29.701,12.313 v2(29.701,12.401)
+5V: C2.1 C3.1 DD1.40 R1.1 R8.2 R9.2 R10.2 R11.2 VD2.1 VD3.2 | length 90.8
  Top Layer w0.155: v2(28.85,12.15) v2@28.882,12.118 ; DD1.40@28.882,11.043 DD1.40@28.9,11.025
  Top Layer w0.3: DD1.40@28.882,11.043 v2@28.882,12.118
  Top Layer w0.5: v2(9.875,15.725) 11.925,15.725 VD2.1@12,15.8 ; v2(21.875,0.525) 23.3,0.525 23.75,0.525 C2.1@23.8,0.575 ; v2(35.375,6.125) 35.394,6.106 35.394,4.906 35.45,4.85 35.525,4.85 37.2,6.525 37.2,6.85 37.375,7.025 37.4,7.025 43.313,7.025 44.35,5.988 44.35,5.475 44.525,5.3 44.525,3.9 R1.1@44.525,2.5 ; R11.2@37.325,16.325 38.525,16.325 38.606,16.406 38.781,16.406 v2(38.8,16.425) ; R1.1@44.725,2.3 44.825,2.2 46.475,2.2 VD3.2@48.35,2.2
  Signal Layer 1 w0.5: v2(21.875,0.525) 9.875,12.525 v2(9.875,15.725) 13.33,15.725 17.58,11.475 18.955,11.475 19.562,12.083 19.562,12.167 20.17,12.775 22.408,12.775 23.683,11.5 25.921,11.5 27.346,10.075 28.9,10.075 29.913,11.088 ; v2@28.823,12.15 v2(28.85,12.15) ; v2(35.375,6.125) 35.356,6.144 34.856,6.144 29.913,11.088 ; v2(38.8,16.425) 33.23,16.425 30.08,13.275 29.589,13.275 28.869,12.556 28.869,12.169 v2(28.85,12.15) ; v2(28.85,12.15) 29.913,11.088
CLK: DD1.44 DS1.4 R3.2 | length 8.2
  Top Layer w0.155: DD1.44@26.9,11.025 26.9,12.21 27.765,13.075 28.475,13.075 ; DS1.4 28.475,13.075 ; R3.2@31.45,15.125 31.425,15.125 30.543,14.243 30.543,13.982 29.386,12.825 28.725,12.825 28.475,13.075
CN_5V_IN: VD1.1 X1.1 | length 2.7
  Top Layer w0.5: X1.1 7.415,12.6 7.925,13.11 VD1.1
CS: DD1.45 DS1.5 R5.2 | length 15
  Top Layer w0.15: DS1.5 28.7,15.125 R5.2@29.775,15.125 ; v1(29.75,14.025) 29.75,15.1 R5.2@29.775,15.125 ; R5.2 R5.2@29.775,15.125
  Top Layer w0.155: DD1.45@26.4,11.025 26.388,11.037 26.388,12.537 v1(27.351,13.501)
  Bottom Layer w0.155: v1(27.351,13.501) 26.974,13.123 26.974,11.867 27.268,11.573 27.268,10.707 27.4,10.575 29.709,10.575 30.204,11.07 30.204,12.808 29.8,13.212 v1@29.8,13.95
D_N: VD1.2 X1.2 | length 3.1
  Top Layer w0.155: X1.2 6.171,12 6.268,11.903 6.799,11.903 7.344,11.358 7.783,11.358 7.874,11.448 7.874,11.634 8.079,11.84 VD1.2
D_P: VD1.3 X1.3 | length 3.1
  Top Layer w0.155: X1.3 6.171,11.5 6.268,11.597 6.673,11.597 7.218,11.052 7.783,11.052 7.874,10.962 7.874,10.776 8.079,10.57 VD1.3
DATA: DD1.43 DS1.3 R4.2 | length 10.3
  Top Layer w0.155: R4.2@23.45,14.35 23.797,14.003 24.815,14.003 24.867,13.95 DS1.3@25.4,13.95 ; v1(24.475,13.35) 24.56,13.435 24.885,13.435 DS1.3@25.4,13.95 ; DS1.3@25.472,14.103 DS1.3 DS1.3@25.4,13.95 ; DD1.43@27.4,11.025 27.405,11.03 v1@27.405,12.076
  Bottom Layer w0.155: v1(24.475,13.35) 26.2,13.35 26.853,14.003 27.559,14.003 27.854,13.709 27.854,13.292 27.476,12.915 v1(27.476,12.076)
GND: 1.1 2.1 BQ1.2 C1.2 C2.2 C3.2 C4.2 C5.2 C6.2 C7.2 C8.2 C9.1 C10.2 C11.2 C12.2 C13.2 C14.2 C15.2 DD1.0 DD1.4 DD1.9 DD1.10 DD1.11 DD1.22 DD1.23 DD1.35 DD1.36 DD1.41 DD1.42 DD1.47 DD1.48 DS1.2 HL1.1 R6.1 S1.1 VD1.4 VD1.5 X1.5 X1.TP1 X2.6 | length 38.9
  Top Layer w0.15: DD1.11 25.4,4.95 DD1.0@25.9,5.45 ; DD1.10 DD1.0@25.9,5.45 ; DD1.9 DD1.0@26.4,5.95 ; DD1.4 DD1.0@26.4,8.45 ; DD1.48 24.9,9.95 DD1.0@25.4,9.45 ; DD1.47 DD1.0@25.4,9.45 ; DD1.42 DD1.0@27.9,7.45 ; DD1.41 DD1.0@28.4,7.95 ; DD1.22 DD1.0@29.4,5.45 ; DD1.23 29.9,3.375 29.9,4.95 DD1.0@29.4,5.45 ; DD1.35 DD1.0@29.9,9.45 ; DD1.36 30.4,9.95 DD1.0@29.9,9.45 ; DD1.0@25.4,9.45 DD1.0@26.4,8.45 ; DD1.0@25.9,5.45 DD1.0@26.4,5.95 ; DD1.0@26.4,5.95 DD1.0 ; DD1.0@26.4,8.45 DD1.0 ; DD1.0 DD1.0@29.4,5.45 ; DD1.0 DD1.0@27.9,7.45 ; DD1.0@27.9,7.45 DD1.0@28.4,7.95 ; DD1.0@28.4,7.95 DD1.0@29.9,9.45
  Top Layer w0.155: DD1.23@29.882,3.357 DD1.23@29.9,3.375
  other v1: 0.6,-0.85 2.6,-0.85 4.6,-0.85 6.6,-0.85 8.6,-0.85 10.6,-0.85 12.6,-0.85 14.6,-0.85 16.6,-0.85 18.6,-0.85 20.6,-0.85 24.6,-0.85 26.6,-0.85 39.4,-0.85 41.4,-0.85 43.4,-0.85 45.4,-0.85 47.4,-0.85 49.4,-0.85 51.4,-0.85 55.325,-0.85 7.9,0.575 17.375,0.65 6.7,1.875 7.9,3.25 17.375,3.325 51.25,4.35 55.3,4.35 7.15,7.2 8.225,8.075 6.975,8.65 15.45,8.775 6.925,9.775 33.65,13.55 32.725,14.525 33.65,14.525 16.7,19.075 1.775,20.275 3.775,20.275 5.775,20.275 8.15,20.275 10.15,20.275 12.15,20.275 14.15,20.275 16.15,20.275 18.15,20.275 20.15,20.275 22.475,20.3 24.475,20.3 26.475,20.3 28.475,20.3 30.475,20.3 55.675,20.3 36.55,20.325 38.55,20.325 40.55,20.325 42.55,20.325 44.55,20.325 46.55,20.325 48.55,20.325 50.675,20.325
NetBQ1_1: BQ1.1 DD1.2 | length 2.9
  Top Layer w0.15: BQ1.1@21.3,8.6 22.131,9.431 23.806,9.431 DD1.2@23.825,9.45
NetBQ1_3: BQ1.3 DD1.1 | length 3.7
  Top Layer w0.15: BQ1.3@20.6,11 21.1,11 22.15,9.95 DD1.1 23.825,9.95 DD1.1@23.806,9.969
NetC8_1: C8.1 DD1.34 R7.2 S1.2 | length 45.1
  Top Layer w0.155: S1.2@8.7,6.5 16.2,6.5 16.45,6.75 v1(16.45,8) ; DD1.34@31.475,8.95 v1(34.087,8.95) ; R7.2@33.9,10.325 33.9,10.35 34.087,10.163 v1(34.087,8.95) ; C8.1@37.475,10.1 C8.1 37.053,9.603 36.978,9.603 36.325,8.95 v1(34.087,8.95)
  Bottom Layer w0.155: v1(16.45,8) 16.45,8.904 15.22,10.134 15.22,12.691 16.981,14.453 30.147,14.453 34.087,10.513 v1(34.087,8.95)
NetC9_2: C9.2 DD1.37 | length 3.9
  Top Layer w0.15: DD1.37@30.4,11.025 33,11.025 33.875,11.9 C9.2@33.95,11.9
NetDD1_5: DD1.5 R6.2 | length 20
  Top Layer w0.155: v1(22.2,8.1) 22.203,8.103 23.058,8.103 23.192,7.968 23.807,7.968 DD1.5@23.825,7.95 ; v1(35.95,0.915) 37.34,0.915 R6.2@37.45,1.025
  Bottom Layer w0.155: v1(22.2,8.1) 22.275,8.175 26.247,8.175 33.507,0.915 v1(35.95,0.915)
NetDS1_1: DS1.1 R2.2 R4.1 | length 5.4
  Top Layer w0.155: R4.1@23.45,15.9 23.55,16 25.475,16 DS1.1 25.625,16.725 26.275,17.375 26.275,18.675 R2.2
NetHL1_2: HL1.2 R1.2 | length 1.5
  Top Layer w0.15: HL1.2 41.65,2.5 R1.2@42.975,2.5
NetHL2_2: HL2.2 R8.1 | length 1.5
  Top Layer w0.15: HL2.2 41.675,5.3 R8.1@42.975,5.3
NetHL3_2: HL3.2 R9.1 | length 1.4
  Top Layer w0.15: HL3.2 R9.1@42.975,3.9
NetL1_1: L1.1 VD2.2 | length 2.4
  Top Layer w0.15: 16.172,15.028 L1.1@17.272,15.028
  Top Layer w0.155: VD2.2@15.4,15.8 16.172,15.028 ; L1.1@17.272,15.028 L1.1@17.4,14.9
NetL1_2: L1.2 VD1.8 | length 3.7
  Top Layer w0.155: VD1.8 17.09,13.11 L1.2@17.4,13.42
NetR10_1: R10.1 S2.1 | length 3
  Top Layer w0.155: R10.1@37.4,8.575 37.425,8.575 37.772,8.922 37.772,8.932 39.3,10.46 S2.1
NetR11_1: R11.1 S2.3 | length 3
  Top Layer w0.155: R11.1@37.325,14.775 37.672,14.428 37.872,14.428 39.3,13 S2.3
NetVD3_1: VD3.1 X2.1 | length 7.1
  Top Layer w0.5: VD3.1@48.35,5.6 52.515,5.6 X2.1
RXLED: DD1.21 HL2.1 | length 18.3
  Top Layer w0.155: v1(28.8,2.3) 28.882,2.382 28.882,3.357 DD1.21@28.9,3.375 ; v1(37.625,5.225) 39.775,5.225 HL2.1@39.95,5.4
  Bottom Layer w0.155: v1(28.8,2.3) 28.9,2.3 31.375,-0.175 36.825,-0.175 37.625,0.625 v1(37.625,5.225)
SCL: DD1.13 S2.2 X2.3 | length 39.7
  Top Layer w0.155: v1(24.75,2.3) 24.75,2.42 24.9,2.57 DD1.13@24.9,3.375 ; v1(45.475,10.4) 47.815,10.4 S2.2 48.2,10.46 49.785,8.875 52.34,8.875 53.407,9.942 54.317,9.942 X2.3
  Bottom Layer w0.155: v1(24.75,2.3) 24.764,2.3 25.267,1.797 28.196,1.797 30.728,-0.735 37.057,-0.735 45.475,7.683 v1(45.475,10.4)
SDA: DD1.14 S2.4 X2.4 | length 38.4
  Top Layer w0.155: DD1.14@25.4,3.375 25.418,3.357 25.418,2.357 v1(25.475,2.3) ; v1(45.45,13) S2.4 49.265,13 X2.4
  Bottom Layer w0.155: v1(25.475,2.3) 28.089,2.3 30.844,-0.455 36.941,-0.455 38,0.604 38,2.275 41.682,5.957 41.682,9.232 v1(45.45,13)
TXLED: DD1.25 HL3.1 | length 9.4
  Top Layer w0.155: DD1.25@31.475,4.45 31.85,4.45 33.275,3.025 36.325,3.025 37.1,3.8 39.875,3.8 HL3.1@39.95,3.875
USB_D_N: DD1.6 VD1.7 | length 12.5
  Top Layer w0.155: VD1.7 14.071,11.84 14.276,11.634 14.276,11.448 14.367,11.358 16.242,11.358 16.484,11.6 v1(16.5,11.6) ; v1(22.85,7.6) 22.85,7.553 23.05,7.353 23.176,7.353 23.327,7.353 23.424,7.45 DD1.6@23.825,7.45
  Bottom Layer w0.155: v1(16.5,11.6) 16.566,11.6 16.813,11.353 17.132,11.353 21.132,7.353 22.537,7.353 22.784,7.6 v1(22.85,7.6)
USB_D_P: DD1.7 VD1.6 | length 12.5
  Top Layer w0.155: VD1.6 14.071,10.57 14.276,10.776 14.276,10.962 14.367,11.052 16.247,11.052 v1(16.5,10.8) ; v1(22.85,6.8) 22.85,6.847 23.05,7.047 23.327,7.047 23.424,6.95 DD1.7@23.825,6.95
  Bottom Layer w0.155: v1(16.5,10.8) 16.566,10.8 16.813,11.047 17.006,11.047 21.006,7.047 22.537,7.047 22.784,6.8 v1(22.85,6.8)
VCCIO: C13.1 C14.1 C15.1 DD1.12 DD1.24 DD1.46 | length 36.4
  Top Layer w0.15: DD1.24@30.4,3.375 30.412,3.363 v1(30.412,2.263)
  Top Layer w0.155: DD1.12@23.528,4.406 23.571,4.45 DD1.12@23.825,4.45 ; v1(25.775,12.675) 25.775,12.041 25.9,11.916 DD1.46@25.9,11.025
  Bottom Layer w0.15: 21.61,3.8 21.61,4.712 21.698,4.8 ; 22.038,4.8 27.875,4.8 v1(30.412,2.263)
  Bottom Layer w0.155: v1(22.7,3.05) 21.95,3.8 15.5,10.25 15.5,12.575 15.603,12.678 25.772,12.678 v1(25.775,12.675)
VPHY: C4.1 C6.1 DD1.3 L2.2 | length 11.5
  Top Layer w0.15: L2.2@20.375,13.89 20.45,13.815 v1(20.45,12.1) ; L2.2 20.4,13.89 20.4,15.35 20.4,16.572 21.1,17.272 C4.1
  Top Layer w0.155: v1(22.675,8.7) 22.913,8.938 23.812,8.938 DD1.3@23.825,8.95
  Bottom Layer w0.15: v1(20.45,12.1) 22.675,9.875 v1(22.675,8.7)
VPLL: C5.1 C7.1 DD1.8 L3.2 | length 16.9
  Top Layer w0.15: v1(22.7,5.95) 22.786,6.036 23.036,6.036 23.45,6.45 DD1.8@23.825,6.45 ; C5.1@30.973,0.369 C5.1@31.102,0.498 ; C5.1@31.004,0.704 31.004,1.804 v1(31.375,2.175) 32.05,1.5 33.125,1.5 33.095,1.47 L3.2
  Bottom Layer w0.15: v1(22.7,5.95) 27.6,5.95 v1(31.375,2.175)
pads on no net: DD1.15 DD1.16 DD1.17 DD1.18 DD1.19 DD1.20 DD1.26 DD1.27 DD1.28 DD1.29 DD1.30 DD1.31 DD1.32 DD1.33 X1.4 X2.2 X2.5

## Polygon pours and split planes (outlines as drawn)
+3.3V on Signal Layer 1 "Signal Layer 1-+3.3V" (solid, pour order 16): -0.025,21.55 0,21.525 57.225,21.525 57.225,-2.225 56.25,-1.25 0,-1.25
+5V on Signal Layer 1 "Signal Layer 1-+5V" (solid, pour order 12): -0.025,21.55
GND on Top Layer "Top Layer-GND" (solid, pour order 20): -0.025,20.85 57.225,20.85 57.225,-0.55 56.35,-1.425 0.025,-1.425
VCCIO on Top Layer (solid, pour order 28): 20.5,1.6 20.5,6.175 22.35,6.175 23.953,4.725 24.375,4.725 24.375,3.8 22.006,1.6
no net on Top Layer "Top Layer-No Net" (solid, pour order 18): -0.025,20.85
GND on Signal Layer 2 "Signal Layer 2-No Net" (solid, pour order 4): 0.225,21.375 57.225,21.375 57.225,-1.175 0.225,-1.175
GND on Bottom Layer "Bottom Layer-GND" (solid, pour order 22): 0.075,20.775 57.325,20.775 57.225,-1.175 0.175,-1.175 0.075,-1.275

## Silkscreen, mask and mechanical layers (free items; w line width, h text height)
Top Overlay:
  text ".designation" at -0.8,19.025 h2
  text "USB - I2C" at 40.975,16.65 h2
  text "GND" at 50.8,11.65 h1.2 r90
  text "SDA" at 50.85,9.175 h1.2 r90
  text "SCL" at 57.275,9.175 h1.2 r90
  text "+5V" at 57.225,6.7 h1.2 r90
  text "RX" at 37.375,4.625 h1.2
  text "TX" at 37.375,3.15 h1.2
  text "PWR" at 39.275,0.425 h1.2
  text "RESET" at 10.85,-0.5 h1.2
Bottom Overlay:
  text ".pcb_dec_number" at 16.175,-1.325 h2
Board:
  the board outline again, w0.1
Assembly Notes (Mech5):
  text "'.title'" at 0,-3.75 h2
  text "'.project'_'.pcb_dec_number'['.Pcb_File_Name_No_Path']" at -0.25,-5.85 h2